# Altium PCB PCB.PcbDoc (part 3 of 6)
Units mm, origin at the board's own origin, x right, y up, seen from the top; angles counter-clockwise.
Board outline 56.61 x 57.68 mm, 2 copper layers (Top Layer, Bottom Layer), stack 0.572 mm thick; 104 components, 100 nets, 551 pads, 332 vias.
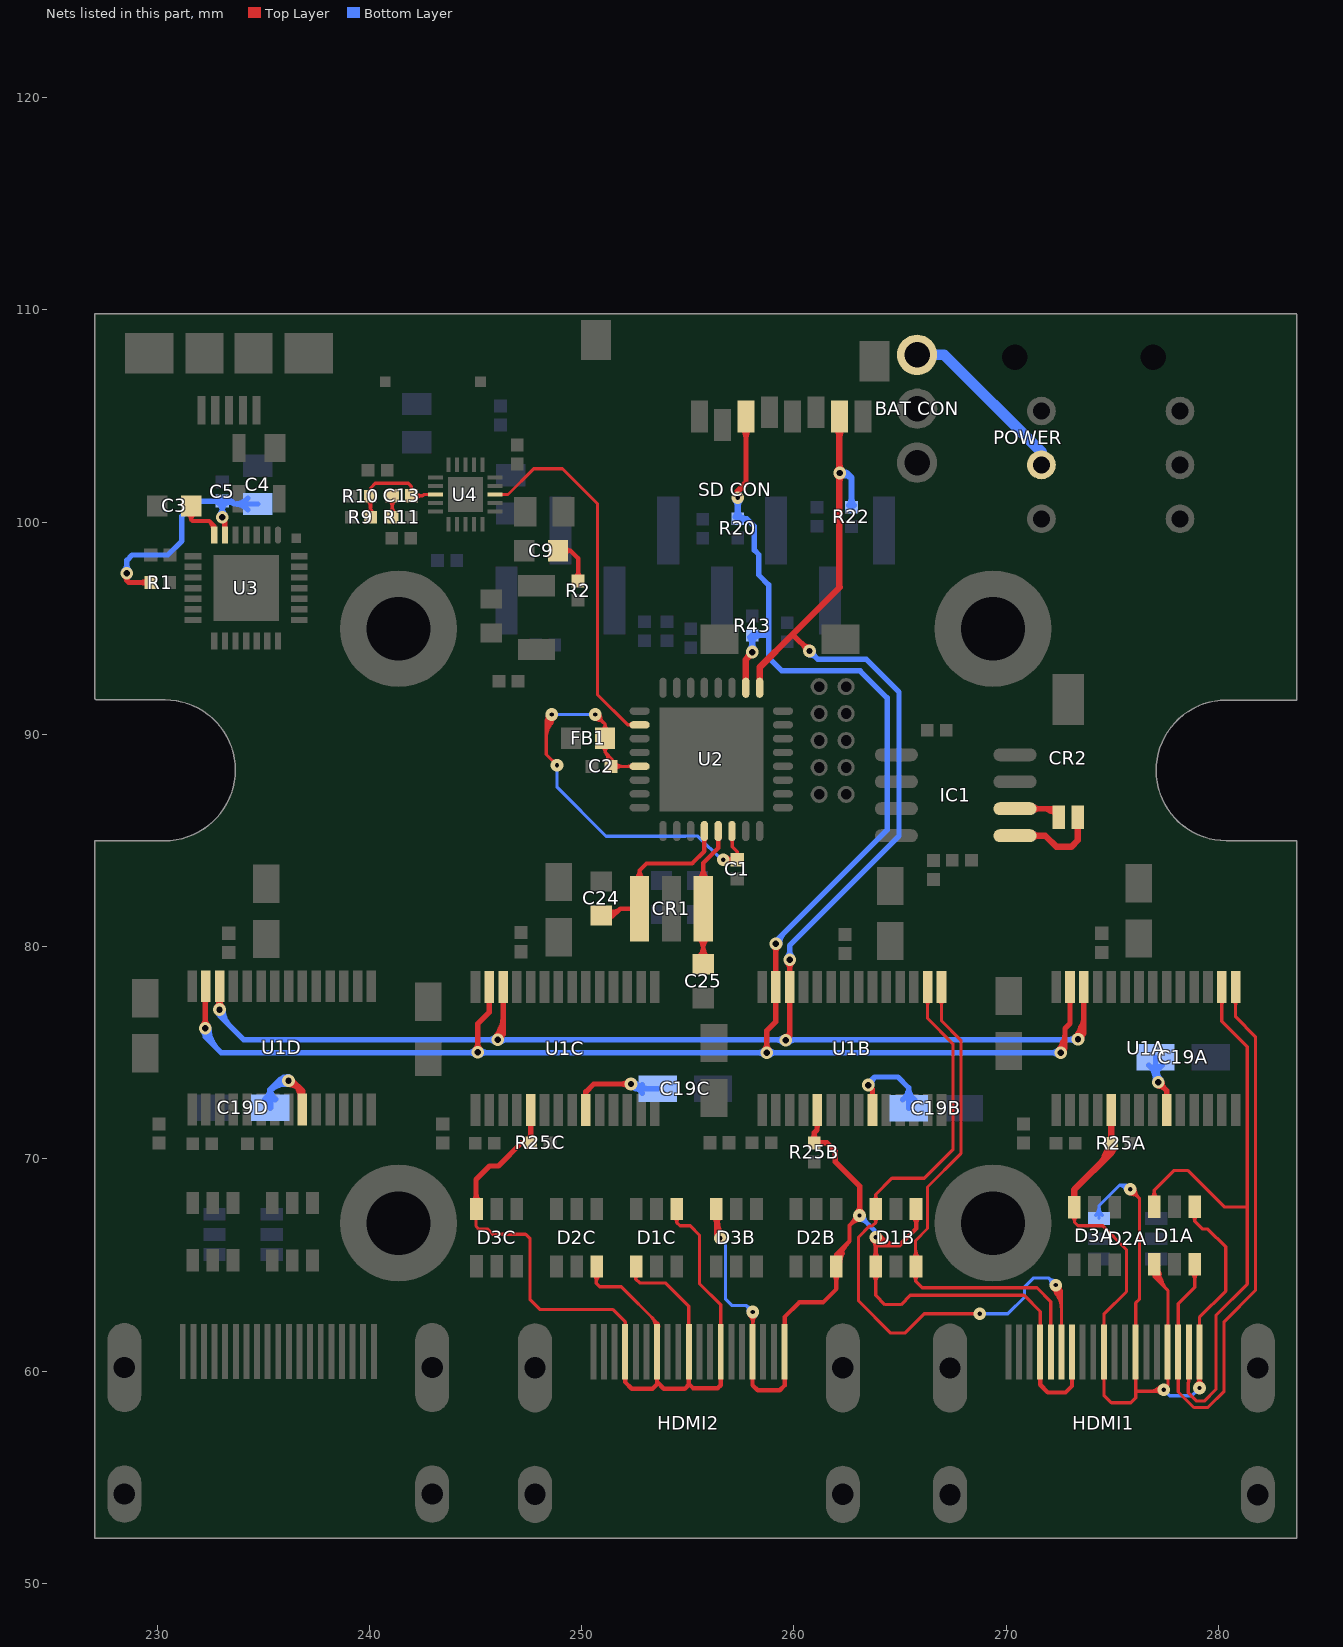
[diagram p3: the nets of this part, all layers, seen from the top]

## Via types
v1: diameter 0.6, hole 0.3, Top Layer to Bottom Layer, tented both sides, 242 vias
v2: diameter 0.6, hole 0.2, Top Layer to Bottom Layer, tented both sides, 80 vias
v3: diameter 0.8, hole 0.4, Top Layer to Bottom Layer, tented both sides, 9 vias
v4: diameter 0.66, hole 0.33, Top Layer to Bottom Layer, tented both sides, 1 vias

## Nets (pads, with @x,y where several pads share a name; then routed paths per layer and width w, separated by ;. In a path a pad name is that pad's centre, name@x,y a point inside that pad or via, vN(x,y) a via of type N, cw(c..) or ccw(c..) an arc to the next point about the centre after c; other vN are vias at no path point) (continued)
MISO: "SD CON.7" R22.2 U1A.26 U1B.26 U1C.26 U1D.26 U2.17 | length 127.9
  Top Layer w0.254: v1@232.84,77.177 ccw(c232.629,77.461) U1D.26@232.983,77.461 ; U1D.26@232.868,77.561 cw(c232.611,77.393) v1@232.908,77.313 ; 232.908,77.37 cw(c232.612,77.37) v1@232.821,77.161 ; U1D.26@232.908,77.472 ccw(c233.291,77.472) v1@233.051,77.173 ; v1(232.943,77.038) 232.95,77.045 U1D.26@232.95,78.139 ; v1@232.983,77.318 cw(c233.25,77.389) U1D.26@233.029,77.555 ; 232.983,77.361 ccw(c233.266,77.361) v1@233.066,77.161 ; v1(246.05,75.616) 246.3,75.866 ; v1@246.077,75.787 ccw(c246.111,76.003) 246.3,75.894 ; v1@246.202,75.698 cw(c246.676,75.956) 246.209,76.225 ; U1C.26@246.3,78.068 246.3,75.866 ; v1(259.613,75.59) 259.8,75.777 259.8,75.981 ; v1(259.8,79.391) U1B.26@259.8,78.1 259.8,75.981 ; 259.944,94.717 v1(260.731,93.929) ; v1(273.38,75.641) 273.656,75.917 ; v1@273.537,75.715 cw(c274.098,75.978) 273.561,76.289 ; 273.653,75.957 cw(c273.405,76.1) v1@273.389,75.814 ; U1A.26@273.656,78.109 273.656,75.917 ; v1@232.821,77.161 ccw(c232.509,77.473) 232.95,77.473 cw(c232.509,77.473) v1@232.821,77.161 ; 232.95,77.378 ccw(c232.714,77.378) 232.881,77.545 cw(c232.714,77.378) 232.95,77.378 ; 232.95,77.378 cw(c233.187,77.378) 233.02,77.545 ccw(c233.187,77.378) 232.95,77.378 ; v1@233.066,77.161 cw(c233.344,77.439) 232.95,77.439 ccw(c233.344,77.439) v1@233.066,77.161 ; 246.3,75.866 ccw(c246.496,75.671) 246.221,75.637 cw(c246.496,75.671) 246.3,75.866 ; 246.3,75.866 cw(c246.105,76.062) 246.071,75.787 ccw(c246.105,76.062) 246.3,75.866 ; 246.3,77.338 ccw(c246.064,77.338) 246.231,77.506 cw(c246.064,77.338) 246.3,77.338 ; 246.3,77.338 cw(c246.537,77.338) 246.37,77.506 ccw(c246.537,77.338) 246.3,77.338 ; 259.8,75.981 cw(c259.582,75.981) 259.599,75.763 ccw(c259.582,75.981) 259.8,75.981 ; 259.8,77.338 ccw(c259.564,77.338) 259.731,77.506 cw(c259.564,77.338) 259.8,77.338 ; 259.8,77.338 cw(c260.037,77.338) 259.87,77.506 ccw(c260.037,77.338) 259.8,77.338 ; 259.8,78.862 ccw(c260.037,78.862) 259.87,78.694 cw(c260.037,78.862) 259.8,78.862 ; 259.8,78.862 cw(c259.564,78.862) 259.731,78.694 ccw(c259.564,78.862) 259.8,78.862 ; 259.8,78.974 ccw(c259.383,78.974) 259.678,79.269 cw(c259.383,78.974) 259.8,78.974 ; 259.8,78.974 cw(c260.218,78.974) 259.923,79.269 ccw(c260.218,78.974) 259.8,78.974 ; 260.436,94.225 ccw(c260.731,94.52) 260.731,94.102 cw(c260.731,94.52) 260.436,94.225 ; 260.436,94.225 cw(c260.14,93.929) 260.558,93.929 ccw(c260.14,93.929) 260.436,94.225 ; v1@273.389,75.814 ccw(c273.407,76.165) 273.656,75.917 ; v1@273.389,75.814 ccw(c273.407,76.165) 273.656,75.917 ; 273.656,75.917 ccw(c273.904,75.668) 273.553,75.65 cw(c273.904,75.668) 273.656,75.917 ; 273.656,77.348 ccw(c273.419,77.348) 273.586,77.515 cw(c273.419,77.348) 273.656,77.348 ; 273.656,77.348 cw(c273.892,77.348) 273.725,77.515 ccw(c273.892,77.348) 273.656,77.348 ; v1@245.927,75.738 ccw(c245.027,76.638) 246.3,76.638 cw(c245.027,76.638) v1@245.927,75.738 ; v1@246.107,75.559 ccw(c245.64,76.025) 246.3,76.025 cw(c245.64,76.025) v1@246.107,75.559 ; v1@273.258,75.764 ccw(c272.298,76.724) 273.656,76.724 cw(c272.298,76.724) v1@273.258,75.764 ; v1@273.437,75.584 ccw(c272.911,76.111) 273.656,76.111 cw(c272.911,76.111) v1@273.437,75.584
  Top Layer w0.305: U2.17@258.383,92.199 258.383,93.156 259.944,94.717 262.153,96.926 ; 262.144,96.936 v1@262.144,102.54 ; v1@262.144,102.346 v1@262.144,102.54 ; 262.144,104.978 v1@262.144,102.54 ; 262.144,104.03 ccw(c261.546,104.03) 261.969,104.453 cw(c261.546,104.03) 262.144,104.03 ; 262.144,104.03 cw(c262.741,104.03) 262.319,104.453 ccw(c262.741,104.03) 262.144,104.03 ; v1@262.049,102.207 cw(c261.821,101.979) 262.144,101.979 ccw(c261.821,101.979) v1@262.049,102.207 ; v1@262.049,102.416 ccw(c261.821,102.644) 262.144,102.644 cw(c261.821,102.644) v1@262.049,102.416 ; 262.144,101.931 cw(c262.533,101.931) 262.258,102.207 ccw(c262.533,101.931) 262.144,101.931 ; 262.144,102.691 ccw(c262.533,102.691) 262.258,102.416 cw(c262.533,102.691) 262.144,102.691
  Bottom Layer w0.254: v1(232.943,77.038) 232.943,76.759 234.086,75.616 v1(246.05,75.616) 273.355,75.616 v1(273.38,75.641) ; v1(259.8,79.391) 259.8,80.052 264.947,85.217 264.947,91.999 263.398,93.548 261.112,93.548 v1(260.731,93.929) ; 245.632,75.616 ccw(c245.632,76.033) 245.927,75.738 cw(c245.632,76.033) 245.632,75.616 ; 245.632,75.616 cw(c245.632,75.198) 245.927,75.493 ccw(c245.632,75.198) 245.632,75.616 ; 246.467,75.616 ccw(c246.467,75.198) 246.172,75.493 cw(c246.467,75.198) 246.467,75.616 ; 246.467,75.616 cw(c246.467,76.033) 246.172,75.738 ccw(c246.467,76.033) 246.467,75.616 ; 259.8,79.809 ccw(c260.218,79.809) 259.923,79.514 cw(c260.218,79.809) 259.8,79.809 ; 259.8,79.809 cw(c259.383,79.809) 259.678,79.514 ccw(c259.383,79.809) 259.8,79.809 ; 261.026,93.634 ccw(c260.731,93.339) 260.731,93.756 cw(c260.731,93.339) 261.026,93.634 ; 261.026,93.634 cw(c261.322,93.929) 260.904,93.929 ccw(c261.322,93.929) 261.026,93.634 ; v1@232.862,77.038 ccw(c233.341,77.038) 233.003,76.7 cw(c233.341,77.038) v1@232.862,77.038 ; v1@233.116,77.038 ccw(c234.209,77.038) 233.436,76.266 cw(c234.209,77.038) v1@233.116,77.038 ; 259.134,75.616 cw(c259.134,75.111) 259.491,75.468 ccw(c259.134,75.111) 259.134,75.616 ; 259.257,75.616 ccw(c259.257,75.947) 259.491,75.713 cw(c259.257,75.947) 259.257,75.616 ; v1@259.736,75.468 cw(c260.092,75.111) 260.092,75.616 ccw(c260.092,75.111) v1@259.736,75.468 ; v1@259.736,75.713 ccw(c259.97,75.947) 259.97,75.616 cw(c259.97,75.947) v1@259.736,75.713 ; 272.901,75.616 ccw(c272.901,76.12) 273.258,75.764 cw(c272.901,76.12) 272.901,75.616 ; 273.024,75.616 cw(c273.024,75.285) 273.258,75.519 ccw(c273.024,75.285) 273.024,75.616
  Bottom Layer w0.305: v1(262.153,102.311) 262.484,102.311 ; R22.2@262.712,100.697 262.712,102.083 ; 262.484,102.311 ccw(c262.484,102.016) 262.263,102.213 cw(c262.484,102.016) 262.484,102.311 ; 262.484,102.311 cw(c262.484,102.607) 262.263,102.41 ccw(c262.484,102.607) 262.484,102.311 ; 262.484,102.311 262.712,102.083 ; 262.712,101.053 ccw(c263.069,101.053) 262.817,100.801 cw(c263.069,101.053) 262.712,101.053 ; 262.712,101.053 cw(c262.356,101.053) 262.608,100.801 ccw(c262.356,101.053) 262.712,101.053 ; 262.712,102.083 ccw(c262.394,101.765) 262.213,102.176 cw(c262.394,101.765) 262.712,102.083
MODE: U2.26 U4.3 | length 18.3
  Top Layer w0.152: U4.3@245.925,101.3 246.532,101.3 247.746,102.514 249.098,102.514 250.749,100.863 250.749,91.872 252.172,90.449 U2.26@252.733,90.449 ; 252.195,90.449 ccw(c252.195,90.687) 252.363,90.519 cw(c252.195,90.687) 252.195,90.449 ; 252.195,90.449 cw(c252.195,90.21) 252.363,90.379 ccw(c252.195,90.21) 252.195,90.449
MOSI: "SD CON.3" R20.2 R43.1 U1A.27 U1B.27 U1C.27 U1D.27 U2.18 | length 126.5
  Top Layer w0.254: v1(232.275,76.157) U1D.27@232.275,78.139 ; v1(245.11,75.032) 245.11,76.378 245.65,76.918 U1C.27@245.65,78.1 ; 257.744,101.838 257.744,104.978 ; v1(258.724,75.006) 258.724,76.048 259.15,76.474 U1B.27@259.15,78.1 v1(259.15,80.143) ; v1(272.567,75.006) 272.771,75.209 272.771,76.149 273.006,76.384 U1A.27@273.006,78.109 ; 272.684,75.543 ccw(c273.031,75.343) v1@272.707,75.108 ; 232.275,76.575 ccw(c232.693,76.575) 232.397,76.28 cw(c232.693,76.575) 232.275,76.575 ; 232.275,76.575 cw(c231.857,76.575) 232.153,76.28 ccw(c231.857,76.575) 232.275,76.575 ; 245.11,75.449 ccw(c245.528,75.449) 245.232,75.154 cw(c245.528,75.449) 245.11,75.449 ; 245.11,75.449 cw(c244.692,75.449) 244.988,75.154 ccw(c244.692,75.449) 245.11,75.449 ; 245.65,77.338 ccw(c245.414,77.338) 245.581,77.506 cw(c245.414,77.338) 245.65,77.338 ; 245.65,77.338 cw(c245.887,77.338) 245.72,77.506 ccw(c245.887,77.338) 245.65,77.338 ; 257.744,103.969 ccw(c257.085,103.969) 257.551,104.435 cw(c257.085,103.969) 257.744,103.969 ; 257.744,103.969 cw(c258.403,103.969) 257.937,104.435 ccw(c258.403,103.969) 257.744,103.969 ; 258.724,75.424 ccw(c259.142,75.424) 258.847,75.129 cw(c259.142,75.424) 258.724,75.424 ; 258.724,75.424 cw(c258.307,75.424) 258.602,75.129 ccw(c258.307,75.424) 258.724,75.424 ; 259.15,77.338 ccw(c258.914,77.338) 259.081,77.506 cw(c258.914,77.338) 259.15,77.338 ; 259.15,77.338 cw(c259.387,77.338) 259.22,77.506 ccw(c259.387,77.338) 259.15,77.338 ; 259.15,78.862 ccw(c259.387,78.862) 259.22,78.694 cw(c259.387,78.862) 259.15,78.862 ; 259.15,78.862 cw(c258.914,78.862) 259.081,78.694 ccw(c258.914,78.862) 259.15,78.862 ; 259.15,79.725 ccw(c258.733,79.725) 259.028,80.02 cw(c258.733,79.725) 259.15,79.725 ; 259.15,79.725 cw(c259.568,79.725) 259.273,80.02 ccw(c259.568,79.725) 259.15,79.725 ; 273.006,77.348 ccw(c272.769,77.348) 272.936,77.515 cw(c272.769,77.348) 273.006,77.348 ; 273.006,77.348 cw(c273.242,77.348) 273.075,77.515 ccw(c273.242,77.348) 273.006,77.348 ; 232.275,77.316 cw(c232.598,77.316) 232.37,77.545 ccw(c232.598,77.316) 232.275,77.316 ; v1@272.445,75.129 ccw(c271.659,75.914) 272.771,75.914 cw(c271.659,75.914) v1@272.445,75.129 ; v1@272.625,74.949 ccw(c272.272,75.301) 272.771,75.301 cw(c272.272,75.301) v1@272.625,74.949
  Top Layer w0.305: v2(257.353,101.143) 257.353,101.448 ; 257.7,101.795 257.353,101.448 ; U2.18@257.733,92.199 257.733,93.522 258.039,93.828 v1(258.039,93.878) ; 257.353,101.448 ccw(c257.594,101.448) 257.444,101.259 cw(c257.594,101.448) 257.353,101.448 ; 257.353,101.448 cw(c257.112,101.448) 257.261,101.259 ccw(c257.112,101.448) 257.353,101.448 ; 257.751,93.54 ccw(c257.412,93.878) 257.891,93.878 cw(c257.412,93.878) 257.751,93.54
  Bottom Layer w0.254: v1@232.189,76.007 cw(c231.694,75.152) 232.649,75.407 ; v1(232.275,76.157) 232.275,75.751 ; v1@245.11,75.006 257.556,75.006 ; v1(245.11,75.032) 245.085,75.006 233.02,75.006 232.275,75.751 ; R20.2@257.353,100.152 257.785,100.152 258.14,99.797 258.14,98.679 258.343,98.476 258.343,97.511 258.813,97.041 258.813,94.673 ; 257.683,75.006 257.556,75.006 ; R43.1@258.039,94.673 258.813,94.673 ; v1(259.15,80.143) 259.15,80.258 264.389,85.496 264.389,91.719 263.119,92.989 259.436,92.989 258.813,93.612 258.813,94.673 ; v1(272.567,75.006) v1(258.724,75.006) 257.556,75.006 ; 232.275,75.751 ccw(c231.884,75.751) 232.155,76.033 cw(c231.884,75.751) 232.275,75.751 ; 232.275,75.751 cw(c232.666,75.751) 232.395,76.033 ccw(c232.666,75.751) 232.275,75.751 ; 257.77,100.152 ccw(c257.77,99.735) 257.475,100.03 cw(c257.77,99.735) 257.77,100.152 ; 257.77,100.152 cw(c257.77,100.57) 257.475,100.275 ccw(c257.77,100.57) 257.77,100.152 ; 258.307,75.006 ccw(c258.307,75.424) 258.602,75.129 cw(c258.307,75.424) 258.307,75.006 ; 258.307,75.006 cw(c258.307,74.589) 258.602,74.884 ccw(c258.307,74.589) 258.307,75.006 ; 258.456,94.673 ccw(c258.456,94.255) 258.161,94.551 cw(c258.456,94.255) 258.456,94.673 ; 258.456,94.673 cw(c258.456,95.091) 258.161,94.795 ccw(c258.456,95.091) 258.456,94.673 ; 259.142,75.006 ccw(c259.142,74.589) 258.847,74.884 cw(c259.142,74.589) 259.142,75.006 ; 259.142,75.006 cw(c259.142,75.424) 258.847,75.129 ccw(c259.142,75.424) 259.142,75.006 ; 272.15,75.006 ccw(c272.15,75.424) 272.445,75.129 cw(c272.15,75.424) 272.15,75.006 ; 272.15,75.006 cw(c272.15,74.589) 272.445,74.884 ccw(c272.15,74.589) 272.15,75.006 ; v1@232.194,76.157 ccw(c232.98,76.157) 232.424,75.602 cw(c232.98,76.157) v1@232.194,76.157 ; v1@232.448,76.157 ccw(c233.847,76.157) 232.858,75.168 cw(c233.847,76.157) v1@232.448,76.157 ; 244.631,75.006 ccw(c244.631,75.511) 244.988,75.154 cw(c244.631,75.511) 244.631,75.006 ; 244.754,75.006 cw(c244.754,74.675) 244.988,74.909 ccw(c244.754,74.675) 244.754,75.006 ; v1@245.232,74.909 cw(c245.466,74.675) 245.466,75.006 ccw(c245.466,74.675) v1@245.232,74.909 ; v1@245.232,75.154 ccw(c245.589,75.511) 245.589,75.006 cw(c245.589,75.511) v1@245.232,75.154 ; v1@259.323,80.143 cw(c260.02,80.143) 259.527,80.635 ccw(c260.02,80.143) v1@259.323,80.143
  Bottom Layer w0.305: R20.2@257.353,100.152 v2(257.353,101.143) ; v1(258.039,93.878) R43.1@258.039,94.673 ; 257.353,100.509 ccw(c257.709,100.509) 257.457,100.257 cw(c257.709,100.509) 257.353,100.509 ; 257.353,100.509 cw(c256.996,100.509) 257.248,100.257 ccw(c256.996,100.509) 257.353,100.509 ; 257.353,100.786 ccw(c256.996,100.786) 257.248,101.038 cw(c256.996,100.786) 257.353,100.786 ; 257.353,100.786 cw(c257.709,100.786) 257.457,101.038 ccw(c257.709,100.786) 257.353,100.786 ; 258.039,94.235 ccw(c258.395,94.235) 258.143,93.983 cw(c258.395,94.235) 258.039,94.235 ; 258.039,94.235 cw(c257.682,94.235) 257.934,93.983 ccw(c257.682,94.235) 258.039,94.235 ; 258.039,94.317 ccw(c257.682,94.317) 257.934,94.569 cw(c257.682,94.317) 258.039,94.317 ; 258.039,94.317 cw(c258.395,94.317) 258.143,94.569 ccw(c258.395,94.317) 258.039,94.317
"NetBAT CON_1": "BAT CON.1" POWER.3 | length 8.4
  Bottom Layer w0.508: 265.8,107.88 267.075,107.88 271.658,103.296 POWER.3@271.658,102.692
NetC1_2: C1.2 C2.2 FB1.2 U2.6 U2.29 | length 48.3
  Top Layer w0.152: 248.336,90.649 cw(c248.471,90.571) v2@248.52,90.719 ; 248.346,90.667 ccw(c248.11,90.803) v2@248.374,90.874 ; 248.391,90.45 ccw(c248.063,90.639) v2@248.394,90.823 ; v2@248.424,90.782 cw(c248.135,90.522) 248.466,90.317 ; 248.463,90.574 cw(c248.727,90.421) v2@248.648,90.716 ; v2@248.537,90.884 cw(c248.292,90.663) 248.572,90.49 ; v2(248.59,90.932) 248.336,90.678 ; v2(248.844,88.544) 248.336,89.052 248.336,90.678 ; v2@250.568,90.916 ccw(c250.887,90.981) 250.803,90.667 ; v2(250.647,90.932) 251.104,90.475 ; v2@250.663,91.011 cw(c250.598,90.692) 250.913,90.777 ; U2.29@252.728,88.494 C2.2@251.384,88.494 251.384,88.875 ; v2(256.674,84.092) C1.2@257.327,84.092 257.327,84.48 ; C1.2@257.099,84.041 ccw(c256.955,84.009) 256.993,84.151 ccw(c257.023,84.263) C1.2@257.123,84.206 ; C1.2@257.099,84.143 cw(c256.955,84.176) 256.993,84.033 cw(c257.023,83.922) C1.2@257.123,83.978 ; U2.6@257.099,85.433 257.099,84.709 257.327,84.48 ; 248.336,90.678 ccw(c248.211,90.803) 248.378,90.86 cw(c248.211,90.803) 248.336,90.678 ; 248.336,90.678 cw(c248.461,90.553) 248.517,90.72 ccw(c248.461,90.553) 248.336,90.678 ; 251.029,90.55 ccw(c250.647,90.168) 250.647,90.708 cw(c250.647,90.168) 251.029,90.55 ; 251.029,90.55 cw(c251.411,90.932) 250.871,90.932 ccw(c251.411,90.932) 251.029,90.55 ; 251.104,89.154 ccw(c250.798,89.154) 250.931,89.43 cw(c250.798,89.154) 251.104,89.154 ; 251.104,89.154 cw(c251.411,89.154) 251.278,89.43 ccw(c251.411,89.154) 251.104,89.154 ; 251.104,89.154 cw(c250.782,88.831) 251.18,88.608 ccw(c250.782,88.831) 251.104,89.154 ; 251.104,89.154 FB1.2@251.104,89.814 251.104,90.475 ; 251.104,89.154 251.384,88.875 ; 251.104,90.475 ccw(c251.411,90.475) 251.278,90.199 cw(c251.411,90.475) 251.104,90.475 ; 251.104,90.475 cw(c250.798,90.475) 250.931,90.199 ccw(c250.798,90.475) 251.104,90.475 ; 251.384,88.875 ccw(c251.577,88.875) 251.49,88.702 cw(c251.577,88.875) 251.384,88.875 ; 251.384,88.875 cw(c251.19,88.875) 251.278,88.702 ccw(c251.19,88.875) 251.384,88.875 ; 251.948,88.494 ccw(c251.948,87.929) 251.549,88.328 cw(c251.948,87.929) 251.948,88.494 ; 251.948,88.494 cw(c251.948,89.058) 251.549,88.659 ccw(c251.948,89.058) 251.948,88.494 ; v2@256.763,84.092 ccw(c256.763,84.657) 257.162,84.258 cw(c256.763,84.657) v2@256.763,84.092 ; v2@256.763,84.092 cw(c256.763,83.528) 257.162,83.927 ccw(c256.763,83.528) v2@256.763,84.092 ; v2@256.862,83.971 cw(c256.973,83.9) 257.007,84.027 ; v2@256.862,83.971 cw(c256.973,83.9) 257.007,84.027 ; v2@256.862,83.971 cw(c256.973,83.9) 257.007,84.027 ; v2@256.862,84.213 ccw(c256.973,84.284) 257.007,84.158 ; v2@256.862,84.213 ccw(c256.973,84.284) 257.007,84.158 ; v2@256.862,84.213 ccw(c256.973,84.284) 257.007,84.158 ; v2@256.892,84.04 cw(c257.048,84.002) 257.007,84.158 ; v2@256.892,84.04 cw(c257.048,84.002) 257.007,84.158 ; v2@256.892,84.04 cw(c257.048,84.002) 257.007,84.158 ; v2@256.892,84.145 ccw(c257.048,84.183) 257.007,84.027 ; v2@256.892,84.145 ccw(c257.048,84.183) 257.007,84.027 ; v2@256.892,84.145 ccw(c257.048,84.183) 257.007,84.027 ; C1.2@257.214,84.092 ccw(c257.214,83.552) 256.832,83.934 cw(c257.214,83.552) C1.2@257.214,84.092 ; C1.2@257.214,84.092 cw(c257.214,84.632) 256.832,84.25 ccw(c257.214,84.632) C1.2@257.214,84.092 ; 257.327,84.48 ccw(c257.533,84.48) 257.437,84.299 cw(c257.533,84.48) 257.327,84.48 ; 257.327,84.48 cw(c257.122,84.48) 257.218,84.299 ccw(c257.122,84.48) 257.327,84.48 ; 248.336,89.778 cw(c249.743,89.778) 248.748,90.774 ccw(c249.743,89.778) 248.336,89.778 ; 248.336,90.146 cw(c249.375,90.146) 248.64,90.882 ccw(c249.375,90.146) 248.336,90.146 ; 248.336,90.514 cw(c249.007,90.514) 248.533,90.989 ccw(c249.007,90.514) 248.336,90.514 ; 251.247,89.012 cw(c250.964,88.729) 251.313,88.533 ccw(c250.964,88.729) 251.247,89.012 ; 251.389,88.869 cw(c251.146,88.627) 251.446,88.459 ccw(c251.146,88.627) 251.389,88.869 ; 252.182,88.494 ccw(c252.182,88.75) 252.363,88.569 cw(c252.182,88.75) 252.182,88.494 ; 252.207,88.494 cw(c252.207,88.273) 252.363,88.429 ccw(c252.207,88.273) 252.207,88.494 ; U2.6@257.013,85.079 cw(c256.807,84.873) 257.099,84.873 ccw(c256.807,84.873) U2.6@257.013,85.079 ; 257.099,84.948 cw(c257.284,84.948) 257.153,85.079 ccw(c257.284,84.948) 257.099,84.948
  Bottom Layer w0.152: v2(248.59,90.932) v2(250.647,90.932) ; v2(248.844,88.544) 248.844,87.503 251.147,85.2 254.886,85.2 254.899,85.212 255.478,85.212 256.598,84.092 v2(256.674,84.092)
NetC3_1: C3.1 U3.7 | length 4.8
  Top Layer w0.203: C3.1@231.61,100.762 231.61,100.114 ; 232.594,99.849 ccw(c232.861,99.921) U3.7@232.723,99.681 ; U3.7@232.699,99.389 232.699,99.813 232.461,100.051 231.673,100.051 231.61,100.114 ; 231.61,100.114 ccw(c231.277,100.114) 231.434,100.407 cw(c231.277,100.114) 231.61,100.114 ; 231.61,100.114 cw(c231.942,100.114) 231.786,100.407 ccw(c231.942,100.114) 231.61,100.114 ; 232.493,100.018 cw(c232.114,99.639) 232.65,99.639 ccw(c232.114,99.639) 232.493,100.018
NetC4_2: C4.2 C5.1 R1.2 U3.6 | length 25.6
  Top Layer w0.254: v1(228.575,97.587) 228.575,97.257 ; R1.2@229.699,97.155 228.676,97.155 228.575,97.257 ; v1(233.07,100.228) 233.07,100.127 233.199,99.999 U3.6@233.199,99.389 ; 228.575,97.257 ccw(c228.346,97.257) 228.476,97.445 cw(c228.346,97.257) 228.575,97.257 ; 228.575,97.257 cw(c228.803,97.257) 228.673,97.445 ccw(c228.803,97.257) 228.575,97.257 ; 229.282,97.155 ccw(c229.282,97.573) 229.577,97.277 cw(c229.282,97.573) 229.282,97.155 ; 229.282,97.155 cw(c229.282,96.737) 229.577,97.033 ccw(c229.282,96.737) 229.282,97.155
  Bottom Layer w0.254: v1(228.575,97.587) 228.575,98.196 228.829,98.45 230.505,98.45 231.165,99.111 231.165,100.279 231.877,100.99 C5.1@233.07,100.99 ; v1(233.07,100.228) C5.1@233.07,100.99 ; C4.2@234.747,100.852 233.64,100.852 ; 228.575,98.004 ccw(c228.992,98.004) 228.697,97.709 cw(c228.992,98.004) 228.575,98.004 ; 228.575,98.004 cw(c228.157,98.004) 228.452,97.709 ccw(c228.157,98.004) 228.575,98.004 ; 232.629,100.99 ccw(c232.629,101.432) 232.941,101.12 cw(c232.629,101.432) 232.629,100.99 ; 232.629,100.99 cw(c232.629,100.549) C5.1@232.941,100.861 ; 232.629,100.99 cw(c232.629,100.549) C5.1@232.941,100.861 ; C5.1@232.941,100.861 cw(c232.629,100.549) 233.07,100.549 ; C5.1@232.941,100.861 cw(c232.629,100.549) 233.07,100.549 ; 233.07,100.549 cw(c233.512,100.549) 233.2,100.861 ccw(c233.512,100.549) 233.07,100.549 ; 233.07,100.646 ccw(c233.488,100.646) 233.193,100.351 cw(c233.488,100.646) 233.07,100.646 ; 233.07,100.646 cw(c232.653,100.646) 232.948,100.351 ccw(c232.653,100.646) 233.07,100.646 ; C5.1@233.07,100.99 233.502,100.99 ; 233.502,100.99 ccw(c233.502,100.573) 233.202,100.863 cw(c233.502,100.573) 233.502,100.99 ; 233.502,100.99 cw(c233.502,101.408) 233.202,101.118 ccw(c233.502,101.408) 233.502,100.99 ; 233.502,100.99 233.64,100.852 ; 233.64,100.852 ccw(c233.416,100.628) 233.197,100.858 cw(c233.416,100.628) 233.64,100.852 ; 233.64,100.852 ccw(c233.64,101.744) 234.284,101.128 cw(c233.64,101.744) 233.64,100.852 ; 233.64,100.852 cw(c233.64,99.961) 234.284,100.577 ccw(c233.64,99.961) 233.64,100.852 ; C5.1@233.021,101.042 cw(c233.236,100.816) 233.456,101.036 ccw(c233.236,100.816) C5.1@233.021,101.042
NetC9_2: C9.2 R2.2 | length 4.9
  Top Layer w0.203: C9.2@248.894,98.654 249.479,98.654 ; R2.2@249.834,97.224 249.834,98.298 249.479,98.654 ; 249.479,98.654 ccw(c249.479,98.383) 249.233,98.497 cw(c249.479,98.383) 249.479,98.654 ; 249.479,98.654 cw(c249.479,98.924) 249.233,98.81 ccw(c249.479,98.924) 249.479,98.654 ; 249.834,97.703 ccw(c250.313,97.703) 249.975,97.364 cw(c250.313,97.703) 249.834,97.703 ; 249.834,97.703 cw(c249.355,97.703) 249.694,97.364 ccw(c249.355,97.703) 249.834,97.703
NetC13_1: C13.1 R9.2 R10.1 U4.13 | length 12.1
  Top Layer w0.152: R9.2@240.055,100.228 240.055,101.6 ; U4.13@243.125,101.3 242.565,101.3 242.51,101.244 ; 240.055,100.769 ccw(c240.596,100.769) 240.214,100.387 cw(c240.596,100.769) 240.055,100.769 ; 240.055,100.769 cw(c239.515,100.769) 239.897,100.387 ccw(c239.515,100.769) 240.055,100.769 ; 240.055,101.6 ccw(c240.275,101.6) 240.163,101.411 cw(c240.275,101.6) 240.055,101.6 ; 240.055,101.6 cw(c239.85,101.6) 239.945,101.417 ccw(c239.85,101.6) 240.055,101.6 ; 240.055,101.6 240.284,101.829 241.833,101.829 241.979,101.683 ; 241.979,101.683 ccw(c242.274,101.683) 242.109,101.438 cw(c242.274,101.683) 241.979,101.683 ; 241.979,101.683 cw(c241.683,101.683) 241.848,101.438 ccw(c241.683,101.683) 241.979,101.683 ; 241.979,101.683 C13.1@241.979,101.244 242.51,101.244 ; 242.51,101.244 ccw(c242.51,100.758) 242.151,101.087 cw(c242.51,100.758) 242.51,101.244 ; 242.51,101.244 cw(c242.51,101.73) 242.151,101.402 ccw(c242.51,101.73) 242.51,101.244 ; R10.1@239.89,101.061 cw(c239.491,100.661) 240.055,100.661 ccw(c239.491,100.661) R10.1@239.89,101.061 ; 240.055,100.696 cw(c240.571,100.696) 240.206,101.061 ccw(c240.571,100.696) 240.055,100.696
NetC13_2: C13.2 R11.1 | length 4.5
  Top Layer w0.152: R11.1@241.079,100.228 C13.2@241.079,101.244 ; 241.079,100.68 ccw(c240.514,100.68) 240.913,101.079 cw(c240.514,100.68) 241.079,100.68 ; 241.079,100.68 cw(c241.643,100.68) 241.244,101.079 ccw(c241.643,100.68) 241.079,100.68 ; 241.079,100.769 ccw(c241.619,100.769) 241.237,100.387 cw(c241.619,100.769) 241.079,100.769 ; 241.079,100.769 cw(c240.538,100.769) 240.92,100.387 ccw(c240.538,100.769) 241.079,100.769
NetC19A_1: C19A.1 U1A.9 | length 12.2
  Top Layer w0.254: v1(277.165,73.609) 277.556,73.218 U1A.9@277.556,72.309 ; 277.46,73.314 ccw(c277.165,73.019) 277.165,73.436 cw(c277.165,73.019) 277.46,73.314 ; 277.46,73.314 cw(c277.755,73.609) 277.338,73.609 ccw(c277.755,73.609) 277.46,73.314 ; 277.556,73.071 ccw(c277.792,73.071) 277.625,72.904 cw(c277.792,73.071) 277.556,73.071 ; 277.556,73.071 cw(c277.319,73.071) 277.486,72.904 ccw(c277.319,73.071) 277.556,73.071
  Bottom Layer w0.254: C19A.1@276.887,74.327 cw(c276.795,74.029) 277.096,74.11 cw(c277.282,74.159) C19A.1@277.212,74.338 ; 276.982,74.028 cw(c276.796,73.842) v1@277.019,73.702 ; C19A.1@277.033,74.803 v1@277.033,73.741 ; v1@277.056,73.744 ccw(c276.913,73.922) 277.111,74.037 ; v1(277.165,73.609) v1@277.033,73.741 ; C19A.1@276.909,74.206 ccw(c277.619,74.396) v1@277.251,73.759 ; C19A.1@276.909,74.206 ccw(c277.619,74.396) v1@277.251,73.759 ; C19A.1@276.909,74.206 ccw(c277.619,74.396) v1@277.251,73.759 ; v1@277.033,73.741 ccw(c276.15,73.741) 276.715,74.42 cw(c276.15,73.741) v1@277.033,73.741 ; v1@277.033,73.741 cw(c277.917,73.741) 277.352,74.42 ccw(c277.917,73.741) v1@277.033,73.741 ; C19A.1@277.033,74.345 ccw(c277.9,74.345) 277.287,73.732 cw(c277.9,74.345) C19A.1@277.033,74.345
NetC19B_1: C19B.1 U1B.9 | length 8.7
  Top Layer w0.203: U1B.9@263.677,72.323 U1B.9@263.7,72.3
  Top Layer w0.254: v1(263.5,73.482) 263.7,73.281 U1B.9@263.7,72.3 ; 263.7,73.062 ccw(c263.937,73.062) 263.77,72.894 cw(c263.937,73.062) 263.7,73.062 ; 263.7,73.062 cw(c263.464,73.062) 263.631,72.894 ccw(c263.464,73.062) 263.7,73.062
  Bottom Layer w0.254: v1(263.5,73.482) 263.5,73.558 263.804,73.863 ; C19B.1@265.405,72.39 265.405,73.355 ; 263.804,73.863 ccw(c264.129,73.539) 263.672,73.498 cw(c264.129,73.539) 263.804,73.863 ; 263.804,73.863 264.897,73.863 265.405,73.355 ; 265.405,73.355 ccw(c266.091,73.355) 265.693,72.796 cw(c266.091,73.355) 265.405,73.355 ; 265.405,73.355 cw(c264.718,73.355) 265.116,72.796 ccw(c264.718,73.355) 265.405,73.355
NetC19C_1: C19C.1 U1C.9 | length 11.4
  Top Layer w0.254: U1C.9@250.2,72.3 250.2,73.162 250.571,73.533 v1(252.324,73.533) ; 250.2,73.062 ccw(c250.437,73.062) 250.27,72.894 cw(c250.437,73.062) 250.2,73.062 ; 250.2,73.062 cw(c249.964,73.062) 250.131,72.894 ccw(c249.964,73.062) 250.2,73.062 ; 251.906,73.533 ccw(c251.906,73.951) 252.201,73.655 cw(c251.906,73.951) 251.906,73.533 ; 251.906,73.533 cw(c251.906,73.115) 252.201,73.411 ccw(c251.906,73.115) 251.906,73.533
  Bottom Layer w0.254: v1(252.324,73.533) 252.552,73.304 ; v1@252.415,73.386 cw(c252.663,72.985) C19C.1@252.899,73.393 ; C19C.1@253.589,73.304 252.552,73.304 ; 252.552,73.304 ccw(c252.552,73.638) 252.858,73.504 cw(c252.552,73.638) 252.552,73.304 ; 252.552,73.304 cw(c252.552,72.971) 252.858,73.105 ccw(c252.552,72.971) 252.552,73.304 ; v1@252.266,73.476 ccw(c252.68,73.889) 252.68,73.304 cw(c252.68,73.889) v1@252.266,73.476 ; v1@252.446,73.655 ccw(c253.293,74.503) 253.293,73.304 cw(c253.293,74.503) v1@252.446,73.655
NetC19D_1: C19D.1 U1D.9 | length 11.8
  Top Layer w0.305: v1(236.195,73.685) 236.22,73.711 236.322,73.711 236.85,73.182 U1D.9@236.85,72.339 ; v1@236.195,73.538 cw(c236.195,72.814) 236.707,73.326 ccw(c236.195,72.814) v1@236.195,73.538 ; 236.502,73.531 cw(c235.835,72.864) 236.778,72.864 ccw(c235.835,72.864) 236.502,73.531
  Bottom Layer w0.305: C19D.1@235.331,72.415 235.331,73.254 ; v1(236.195,73.685) 236.169,73.711 235.788,73.711 ; 235.331,73.254 ccw(c235.838,73.254) 235.576,72.82 cw(c235.838,73.254) 235.331,73.254 ; 235.331,73.254 cw(c234.824,73.254) 235.086,72.82 ccw(c234.824,73.254) 235.331,73.254 ; 235.331,73.254 cw(c236.042,72.543) 236.175,73.539 ccw(c236.042,72.543) 235.331,73.254 ; 235.331,73.254 235.788,73.711 ; 235.788,73.711 cw(c235.788,73.295) 236.088,73.583 ccw(c235.788,73.295) 235.788,73.711 ; 235.767,73.689 cw(c236.145,73.312) 236.215,73.841 ccw(c236.145,73.312) 235.767,73.689
NetC24_2: C24.2 CR1.1 U2.4 | length 15.6
  Top Layer w0.203: C24.2@250.927,81.471 251.498,81.471 ; CR1.1@252.729,81.788 251.816,81.788 ; CR1.1@252.73,81.789 252.73,83.591 ; U2.4@255.783,85.449 255.783,84.5 255.205,83.922 253.06,83.922 252.73,83.591 ; 251.498,81.471 ccw(c251.498,81.257) 251.299,81.335 cw(c251.498,81.257) 251.498,81.471 ; 251.498,81.471 cw(c251.498,81.684) 251.299,81.606 ccw(c251.498,81.684) 251.498,81.471 ; 251.498,81.471 251.816,81.788 ; 251.816,81.788 cw(c251.486,82.117) 251.19,81.758 ccw(c251.486,82.117) 251.816,81.788 ; 252.73,83.591 ccw(c253.268,83.591) 252.941,83.164 cw(c253.268,83.591) 252.73,83.591 ; 252.73,83.591 cw(c252.196,83.591) 252.518,83.166 ccw(c252.196,83.591) 252.73,83.591 ; 255.783,84.972 ccw(c255.606,84.972) 255.731,85.097 cw(c255.606,84.972) 255.783,84.972 ; 255.783,84.972 cw(c255.96,84.972) 255.835,85.097 ccw(c255.96,84.972) 255.783,84.972 ; C24.2@250.931,81.445 ccw(c251.2,81.771) 251.5,81.472 cw(c251.2,81.771) C24.2@250.931,81.445 ; C24.2@251.06,81.602 ccw(c251.343,81.944) 251.658,81.63 cw(c251.343,81.944) C24.2@251.06,81.602
NetC25_2: C25.2 CR1.3 U2.5 | length 15.2
  Top Layer w0.203: C25.2@255.727,79.172 255.727,81.787 CR1.3@255.729,81.788 255.729,83.943 256.433,84.647 U2.5@256.433,85.449 ; 255.727,80.073 ccw(c256.629,80.073) 255.991,79.436 cw(c256.629,80.073) 255.727,80.073 ; 255.727,80.073 cw(c254.826,80.073) 255.463,79.436 ccw(c254.826,80.073) 255.727,80.073 ; 255.729,83.729 ccw(c256.57,83.729) 255.975,83.134 cw(c256.57,83.729) 255.729,83.729 ; 255.729,83.729 cw(c254.887,83.729) 255.482,83.134 ccw(c254.887,83.729) 255.729,83.729 ; 256.433,84.972 ccw(c256.256,84.972) 256.381,85.097 cw(c256.256,84.972) 256.433,84.972 ; 256.433,84.972 cw(c256.61,84.972) 256.485,85.097 ccw(c256.61,84.972) 256.433,84.972 ; CR1.3@255.482,80.442 cw(c254.891,79.85) 255.727,79.85 ccw(c254.891,79.85) CR1.3@255.482,80.442 ; 255.727,79.844 cw(c256.573,79.844) 255.975,80.442 ccw(c256.573,79.844) 255.727,79.844
NetCR2_1: CR2.1 IC1.2 | length 5.1
  Top Layer w0.254: IC1.2@270.413,86.5 CR2.1@272.313,86.5 ; 272.02,86.42 ccw(c272.154,86.652) CR2.1@272.349,86.469 ; 271.554,86.5 ccw(c271.554,86.071) 271.25,86.374 cw(c271.554,86.071) 271.554,86.5 ; 271.554,86.5 cw(c271.554,86.929) 271.25,86.626 ccw(c271.554,86.929) 271.554,86.5 ; 271.696,86.5 cw(c271.696,85.57) 272.353,86.228 ccw(c271.696,85.57) 271.696,86.5
NetCR2_2: CR2.2 IC1.1 | length 6.7
  Top Layer w0.305: IC1.1@270.413,85.23 271.843,85.23 272.364,84.709 273.075,84.709 273.375,85.009 CR2.2@273.375,86.1 ; 271.493,85.23 ccw(c271.493,84.862) 271.232,85.122 cw(c271.493,84.862) 271.493,85.23 ; 271.493,85.23 cw(c271.493,85.598) 271.232,85.338 ccw(c271.493,85.598) 271.493,85.23 ; 273.375,85.494 ccw(c273.019,85.494) 273.271,85.746 cw(c273.019,85.494) 273.375,85.494 ; 273.375,85.494 cw(c273.732,85.494) 273.48,85.746 ccw(c273.732,85.494) 273.375,85.494
NetD1A_1: D1A.1 D1A.4 D2A.6 D3A.3 HDMI1.1 HDMI1.4 HDMI1.7 HDMI1.10 R25A.2 U1A.5 | length 81.3
  Top Layer w0.152: D3A.3@273.215,67.716 273.215,67.018 ; v2@275.765,68.564 ccw(c276.084,68.629) 275.999,68.315 ; v2(275.844,68.58) 276.276,68.148 ; v2@275.86,68.659 cw(c275.795,68.34) 276.109,68.425 ; 276.154,63.276 276.212,63.335 ; 276.276,68.123 276.276,63.398 276.212,63.335 ; D1A.4@276.941,64.759 cw(c276.483,63.972) 277.363,64.205 ; D1A.4@276.942,64.758 cw(c276.754,64.421) 277.128,64.519 ; D1A.4@276.977,65.046 276.977,64.45 ; D1A.4@277.018,64.891 cw(c276.745,64.422) D1A.4@277.269,64.56 ; 277.139,64.477 cw(c277.434,64.555) D1A.4@277.17,64.708 ; D1A.1@278.877,67.746 278.877,67.071 ; HDMI1.1@279.045,59.717 cw(c278.914,59.642) 279.06,59.603 ; 279.059,59.599 cw(c279.21,59.558) HDMI1.1@279.132,59.694 ; HDMI1.1@279.068,59.694 cw(c278.99,59.558) 279.141,59.599 ; v2(279.1,59.212) HDMI1.1@279.1,60.909 279.1,62.54 280.34,63.779 280.34,65.862 279.502,66.7 279.248,66.7 278.877,67.071 ; 279.14,59.603 cw(c279.286,59.642) HDMI1.1@279.155,59.717 ; 273.215,67.018 ccw(c272.823,67.018) 273.068,67.324 cw(c272.823,67.018) 273.215,67.018 ; 273.215,67.018 cw(c273.635,67.018) 273.356,67.332 ccw(c273.635,67.018) 273.215,67.018 ; 273.215,67.018 273.38,66.853 274.549,66.853 275.666,65.735 275.666,63.755 274.6,62.689 HDMI1.10@274.6,60.909 274.6,58.877 274.955,58.522 275.869,58.522 276.098,58.75 276.098,59.131 ; 274.6,59.595 ccw(c274.446,59.595) 274.555,59.704 cw(c274.446,59.595) 274.6,59.595 ; 274.6,59.595 cw(c274.754,59.595) 274.645,59.704 ccw(c274.754,59.595) 274.6,59.595 ; 274.6,62.223 ccw(c274.754,62.223) 274.645,62.114 cw(c274.754,62.223) 274.6,62.223 ; 274.6,62.223 cw(c274.446,62.223) 274.555,62.114 ccw(c274.446,62.223) 274.6,62.223 ; 276.098,59.131 276.174,59.055 277.368,59.055 277.617,59.304 277.617,63.809 ; 276.098,59.131 276.098,60.907 HDMI1.7@276.1,60.909 276.1,63.223 276.212,63.335 ; 276.1,62.223 ccw(c276.254,62.223) 276.145,62.114 cw(c276.254,62.223) 276.1,62.223 ; 276.1,62.223 cw(c275.946,62.223) 276.055,62.114 ccw(c275.946,62.223) 276.1,62.223 ; 276.226,68.198 ccw(c275.844,67.816) 275.844,68.356 cw(c275.844,67.816) 276.226,68.198 ; 276.226,68.198 cw(c276.608,68.58) 276.068,68.58 ccw(c276.608,68.58) 276.226,68.198 ; 276.977,64.45 ccw(c276.781,64.45) 276.872,64.623 cw(c276.781,64.45) 276.977,64.45 ; 276.977,64.45 cw(c277.172,64.45) 277.081,64.623 ccw(c277.172,64.45) 276.977,64.45 ; 276.977,64.45 277.617,63.809 ; 277.062,59.055 ccw(c277.062,59.488) 277.368,59.182 cw(c277.062,59.488) 277.062,59.055 ; 277.062,59.055 cw(c277.062,58.775) 277.261,58.973 ccw(c277.062,58.775) 277.062,59.055 ; 277.617,63.809 cw(c278.623,64.815) 277.201,64.82 ccw(c278.623,64.815) 277.617,63.809 ; 278.877,67.071 ccw(c278.538,67.071) 278.742,67.342 cw(c278.538,67.071) 278.877,67.071 ; 278.877,67.071 cw(c279.216,67.071) 279.012,67.342 ccw(c279.216,67.071) 278.877,67.071 ; 279.1,59.595 ccw(c278.946,59.595) 279.055,59.704 cw(c278.946,59.595) 279.1,59.595 ; 279.1,59.595 cw(c279.254,59.595) 279.145,59.704 ccw(c279.254,59.595) 279.1,59.595 ; HDMI1.1@279.1,59.752 ccw(c279.64,59.752) 279.258,59.37 cw(c279.64,59.752) HDMI1.1@279.1,59.752 ; HDMI1.1@279.1,59.752 cw(c278.56,59.752) 278.942,59.37 ccw(c278.56,59.752) HDMI1.1@279.1,59.752 ; 279.1,62.223 ccw(c279.254,62.223) 279.145,62.114 cw(c279.254,62.223) 279.1,62.223 ; 279.1,62.223 cw(c278.946,62.223) 279.055,62.114 ccw(c278.946,62.223) 279.1,62.223 ; HDMI1.7@276.055,59.704 cw(c275.951,59.6) 276.098,59.6 ccw(c275.951,59.6) HDMI1.7@276.055,59.704 ; 276.098,59.59 cw(c276.259,59.59) 276.145,59.704 ccw(c276.259,59.59) 276.098,59.59 ; 276.695,59.055 ccw(c276.695,59.855) 277.261,59.289 cw(c276.695,59.855) 276.695,59.055 ; D1A.4@276.896,64.821 ccw(c277.591,64.818) 277.099,64.327 cw(c277.591,64.818) D1A.4@276.896,64.821 ; D1A.4@277.048,64.82 ccw(c278.107,64.817) 277.358,64.068 cw(c278.107,64.817) D1A.4@277.048,64.82 ; HDMI1.4@277.555,59.704 cw(c277.404,59.554) 277.617,59.554 ccw(c277.404,59.554) HDMI1.4@277.555,59.704 ; HDMI1.4@277.555,62.114 ccw(c277.404,62.265) 277.617,62.265 cw(c277.404,62.265) HDMI1.4@277.555,62.114
  Top Layer w0.305: D3A.3@273.207,67.724 273.207,68.56 274.956,70.308 U1A.5@274.956,72.309 ; 274.643,70.099 cw(c275.458,69.881) R25A.2@275.036,70.611 ; 273.207,68.305 ccw(c273.564,68.305) 273.312,68.053 cw(c273.564,68.305) 273.207,68.305 ; 273.207,68.305 cw(c272.851,68.305) 273.103,68.053 ccw(c272.851,68.305) 273.207,68.305 ; 274.41,69.762 ccw(c273.433,70.739) 274.815,70.739 cw(c273.433,70.739) 274.41,69.762 ; R25A.2@274.858,70.635 cw(c274.622,70.399) 274.956,70.399 ccw(c274.622,70.399) R25A.2@274.858,70.635 ; R25A.2@274.858,70.843 ccw(c274.622,71.079) 274.956,71.079 cw(c274.622,71.079) R25A.2@274.858,70.843 ; 274.93,70.283 ccw(c274.474,70.739) 275.119,70.739 cw(c274.474,70.739) 274.93,70.283 ; 274.956,70.367 cw(c275.334,70.367) 275.067,70.635 ccw(c275.334,70.367) 274.956,70.367 ; 274.956,71.111 ccw(c275.334,71.111) 275.067,70.843 cw(c275.334,71.111) 274.956,71.111
  Bottom Layer w0.152: D2A.6@274.371,67.193 274.371,67.793 275.336,68.758 ; v2(275.844,68.58) 275.666,68.758 275.336,68.758 ; v2(277.419,59.131) 277.698,58.852 278.74,58.852 v2(279.1,59.212) ; 274.371,67.733 ccw(c274.911,67.733) 274.529,67.351 cw(c274.911,67.733) 274.371,67.733 ; 274.371,67.733 cw(c273.831,67.733) 274.213,67.351 ccw(c273.831,67.733) 274.371,67.733 ; 275.336,68.758 cw(c275.336,68.46) 275.626,68.528 ccw(c275.336,68.46) 275.336,68.758 ; 275.529,68.758 cw(c275.529,68.505) 275.775,68.564 ccw(c275.529,68.505) 275.529,68.758
NetD1A_3: D1A.3 HDMI1.2 U1A.16 | length 33.3
  Top Layer w0.152: D1A.3@276.977,67.746 276.977,68.53 277.911,69.464 278.541,69.464 280.264,67.742 281.356,67.742 ; HDMI1.2@278.6,60.909 278.6,59.5 278.571,59.471 278.571,58.993 278.967,58.598 279.324,58.598 279.883,59.157 279.883,62.636 281.356,64.11 281.356,67.742 ; U1A.16@280.156,78.109 280.156,76.486 281.356,75.286 281.356,67.742 ; 276.977,68.511 ccw(c277.517,68.511) 277.135,68.129 cw(c277.517,68.511) 276.977,68.511 ; 276.977,68.511 cw(c276.437,68.511) 276.819,68.129 ccw(c276.437,68.511) 276.977,68.511 ; 278.6,59.595 ccw(c278.446,59.595) 278.555,59.704 cw(c278.446,59.595) 278.6,59.595 ; 278.6,59.595 cw(c278.754,59.595) 278.645,59.704 ccw(c278.754,59.595) 278.6,59.595 ; 280.156,77.225 ccw(c279.796,77.225) 280.05,77.479 cw(c279.796,77.225) 280.156,77.225 ; 280.156,77.225 cw(c280.515,77.225) 280.261,77.479 ccw(c280.515,77.225) 280.156,77.225
NetD1A_6: D1A.6 HDMI1.3 U1A.15 | length 33
  Top Layer w0.152: 278.1,59.034 HDMI1.3@278.1,60.909 278.1,63.18 278.877,63.956 D1A.6@278.877,65.046 ; 278.108,59.025 278.841,58.293 279.502,58.293 280.264,59.055 280.264,62.332 281.737,63.805 281.737,75.768 280.806,76.699 U1A.15@280.806,78.109 ; 278.1,59.595 ccw(c277.946,59.595) 278.055,59.704 cw(c277.946,59.595) 278.1,59.595 ; 278.1,59.595 cw(c278.254,59.595) 278.145,59.704 ccw(c278.254,59.595) 278.1,59.595 ; 278.1,62.223 ccw(c278.254,62.223) 278.145,62.114 cw(c278.254,62.223) 278.1,62.223 ; 278.1,62.223 cw(c277.946,62.223) 278.055,62.114 ccw(c277.946,62.223) 278.1,62.223 ; 278.877,64.28 ccw(c278.337,64.28) 278.719,64.662 cw(c278.337,64.28) 278.877,64.28 ; 278.877,64.28 cw(c279.417,64.28) 279.035,64.662 ccw(c279.417,64.28) 278.877,64.28 ; 280.806,77.225 ccw(c280.446,77.225) 280.7,77.479 cw(c280.446,77.225) 280.806,77.225 ; 280.806,77.225 cw(c281.165,77.225) 280.911,77.479 ccw(c281.165,77.225) 280.806,77.225
NetD1B_1: D1B.1 D1B.4 D2B.6 D3B.3 HDMI1.13 HDMI1.16 HDMI2.1 HDMI2.4 R25B.2 U1B.5 | length 87.9
  Top Layer w0.152: HDMI2.4@258.052,60.924 258.052,62.777 v2(258.064,62.789) ; 258.08,62.324 ccw(c258.346,62.253) HDMI2.4@258.108,62.115 ; D1B.4@263.855,64.94 263.855,63.576 264.287,63.144 265.049,63.144 265.481,63.576 270.84,63.576 271.6,62.816 HDMI1.16@271.6,60.909 ; 258.052,62.238 ccw(c258.206,62.238) 258.098,62.129 cw(c258.206,62.238) 258.052,62.238 ; 258.052,62.238 cw(c257.898,62.238) 258.007,62.129 ccw(c257.898,62.238) 258.052,62.238 ; 263.855,64.175 ccw(c263.315,64.175) 263.697,64.557 cw(c263.315,64.175) 263.855,64.175 ; 263.855,64.175 cw(c264.395,64.175) 264.013,64.557 ccw(c264.395,64.175) 263.855,64.175 ; 271.6,62.223 ccw(c271.754,62.223) 271.645,62.114 cw(c271.754,62.223) 271.6,62.223 ; 271.6,62.223 cw(c271.446,62.223) 271.555,62.114 ccw(c271.446,62.223) 271.6,62.223 ; v2@257.906,62.631 cw(c257.552,62.276) 258.052,62.276 ccw(c257.552,62.276) v2@257.906,62.631 ; HDMI2.4@258.052,62.221 cw(c258.632,62.221) 258.222,62.631 ccw(c258.632,62.221) HDMI2.4@258.052,62.221
  Top Layer w0.203: D3B.3@256.238,67.243 cw(c256.07,66.952) 256.394,67.039 ; D3B.3@256.348,67.603 256.348,66.46 v2(256.54,66.269) ; v2@256.369,66.368 ccw(c256.208,66.462) 256.369,66.556 ccw(c256.523,66.645) v2@256.531,66.467 ; v2@256.395,66.404 ccw(c256.137,66.645) 256.442,66.821 ; 256.446,66.844 cw(c257.047,67.005) D3B.3@256.509,67.316 ; v2@256.544,66.265 ccw(c256.347,66.449) 256.58,66.583 ; 258.052,59.346 HDMI2.4@258.052,60.924 ; 258.076,59.323 258.293,59.106 259.334,59.106 259.563,59.334 259.563,62.56 260.248,63.246 261.366,63.246 262.001,63.881 261.996,63.886 D2B.6@261.996,64.94 261.996,65.502 ; D2B.6@261.916,65.347 ccw(c261.785,65.641) 262.096,65.558 ccw(c262.393,65.478) D2B.6@262.152,65.288 ; D2B.6@261.998,65.161 ccw(c261.677,65.718) 262.298,65.551 ; 262.83,67.093 cw(c263.161,67.004) v2@263.092,67.34 ; 262.851,67.072 ccw(c262.762,67.403) v2@263.098,67.334 ; v2(263.093,67.335) 262.622,66.864 262.622,66.128 261.996,65.502 ; D1B.4@263.855,64.94 v2(263.855,66.319) ; v2@263.875,66.122 cw(c263.92,65.676) 264.207,66.02 cw(c264.481,66.349) v2@264.053,66.329 ; 263.931,65.938 264.973,65.938 ; D1B.1@265.76,67.536 265.76,66.726 264.973,65.938 ; HDMI1.16@271.6,60.9 271.6,59.362 271.958,59.004 272.796,59.004 273.101,59.309 HDMI1.13@273.101,60.899 ; 261.996,64.236 ccw(c261.517,64.236) 261.856,64.575 cw(c261.517,64.236) 261.996,64.236 ; 261.996,64.236 cw(c262.475,64.236) 262.136,64.575 ccw(c262.475,64.236) 261.996,64.236 ; 261.996,65.502 ccw(c262.182,65.502) 262.092,65.339 cw(c262.182,65.502) 261.996,65.502 ; 261.996,65.502 cw(c261.81,65.502) 261.9,65.339 ccw(c261.81,65.502) 261.996,65.502 ; 262.755,66.997 ccw(c262.416,67.335) 262.895,67.335 cw(c262.416,67.335) 262.755,66.997 ; 262.755,66.997 cw(c263.093,66.658) 263.093,67.137 ccw(c263.093,66.658) 262.755,66.997 ; 263.855,65.644 ccw(c264.334,65.644) 263.995,65.305 cw(c264.334,65.644) 263.855,65.644 ; 263.855,65.644 cw(c263.376,65.644) 263.715,65.305 ccw(c263.376,65.644) 263.855,65.644 ; 263.855,65.84 ccw(c263.376,65.84) 263.715,66.179 cw(c263.376,65.84) 263.855,65.84 ; 263.855,65.84 cw(c264.334,65.84) 263.995,66.179 ccw(c264.334,65.84) 263.855,65.84 ; 264.973,65.938 cw(c264.973,67.107) 264.017,66.434 ccw(c264.973,67.107) 264.973,65.938 ; D3B.3@256.197,67.275 cw(c255.83,66.908) 256.348,66.908 ccw(c255.83,66.908) D3B.3@256.197,67.275 ; 256.348,66.72 ccw(c256.991,66.72) 256.537,66.265 cw(c256.991,66.72) 256.348,66.72 ; 256.348,66.964 cw(c256.788,66.964) 256.477,67.275 ccw(c256.788,66.964) 256.348,66.964 ; D3B.3@256.348,67.21 ccw(c257.482,67.21) 256.68,66.409 cw(c257.482,67.21) D3B.3@256.348,67.21 ; D2B.6@261.991,65.165 cw(c262.792,65.165) 262.226,65.731 ccw(c262.792,65.165) D2B.6@261.991,65.165 ; D2B.6@262.194,65.165 cw(c263.486,65.165) 262.573,66.078 ccw(c263.486,65.165) D2B.6@262.194,65.165 ; v2@263.685,66.2 ccw(c264.189,66.555) 264.189,65.938 cw(c264.189,66.555) v2@263.685,66.2 ; v2@263.851,66.317 ccw(c264.581,66.831) 264.581,65.938 cw(c264.581,66.831) v2@263.851,66.317 ; D1B.1@265.615,67.275 cw(c265.264,66.924) 265.76,66.924 ccw(c265.264,66.924) D1B.1@265.615,67.275 ; 265.76,66.948 cw(c266.222,66.948) 265.895,67.275 ccw(c266.222,66.948) 265.76,66.948
  Top Layer w0.254: U1B.5@261.087,72.286 261.087,71.374 260.96,71.247 R25B.2@260.96,70.757 261.551,70.757 261.95,70.358 261.95,69.862 263.093,68.719 v2(263.093,67.335) ; 260.96,71.175 ccw(c261.377,71.175) R25B.2@261.082,70.88 ; 260.96,71.175 cw(c260.542,71.175) 260.837,70.88 ccw(c260.542,71.175) 260.96,71.175 ; 260.96,71.175 ccw(c261.377,71.175) R25B.2@261.082,70.88 ; R25B.2@261.082,70.88 ccw(c261.377,71.175) 261.377,70.757 ; R25B.2@261.082,70.88 ccw(c261.377,71.175) 261.377,70.757 ; 261.377,70.757 ccw(c261.377,70.34) 261.082,70.635 cw(c261.377,70.34) 261.377,70.757 ; 263.093,67.753 ccw(c263.511,67.753) 263.216,67.458 cw(c263.511,67.753) 263.093,67.753 ; 263.093,67.753 cw(c262.676,67.753) 262.971,67.458 ccw(c262.676,67.753) 263.093,67.753 ; 261.087,71.505 cw(c261.37,71.505) 261.17,71.706 ccw(c261.37,71.505) 261.087,71.505
  Bottom Layer w0.152: v2(256.54,66.269) 256.773,66.035 256.773,63.419 257.099,63.094 257.759,63.094 ; v2@257.843,62.826 ccw(c257.538,62.877) 257.759,63.094 ; v2@257.844,62.829 ccw(c257.551,62.881) 257.759,63.094 ; v2@258.024,63.009 cw(c257.972,63.301) 257.759,63.094 ; v2@258.027,63.01 cw(c257.976,63.315) 257.759,63.094 ; v2(258.064,62.789) 257.759,63.094 ; 257.759,63.094 ccw(c257.974,63.308) 258.026,63.009 cw(c257.974,63.308) 257.759,63.094 ; 257.759,63.094 cw(c257.545,62.879) 257.844,62.827 ccw(c257.545,62.879) 257.759,63.094
  Bottom Layer w0.203: v2(263.093,67.335) 263.855,66.573 v2(263.855,66.319) ; 263.432,66.997 ccw(c263.093,66.658) 263.093,67.137 cw(c263.093,66.658) 263.432,66.997 ; 263.432,66.997 cw(c263.771,67.335) 263.292,67.335 ccw(c263.771,67.335) 263.432,66.997
NetD1B_3: D1B.3 HDMI1.14 U1B.16 | length 45.9
  Top Layer w0.152: U1B.16@266.294,78.081 266.294,76.632 267.487,75.438 267.487,70.434 266.141,69.088 264.617,69.088 263.855,68.326 ; v2(268.757,62.713) 266.141,62.713 265.227,61.798 264.566,61.798 263.042,63.322 263.042,66.319 263.571,66.848 263.698,66.848 263.855,67.005 ; v2@272.281,63.843 cw(c272.202,63.548) 272.466,63.701 ; v2(272.339,64.059) 272.6,63.798 ; 272.358,63.616 cw(c272.639,63.791) v2@272.392,64.011 ; v2@272.402,63.844 cw(c272.45,63.679) 272.599,63.765 ; 272.466,63.443 cw(c272.797,63.65) v2@272.506,63.91 ; v2@272.537,63.954 ccw(c272.891,63.766) 272.544,63.566 ; v2@272.555,64.001 ccw(c272.819,63.93) 272.582,63.794 ; HDMI1.14@272.6,60.909 272.6,63.798 ; 263.855,67.005 ccw(c263.592,67.005) 263.734,67.227 cw(c263.592,67.005) 263.855,67.005 ; 263.855,67.005 cw(c264.119,67.005) 263.976,67.227 ccw(c264.119,67.005) 263.855,67.005 ; 263.855,67.005 D1B.3@263.855,67.64 263.855,68.326 ; 263.855,68.326 ccw(c264.218,68.326) 263.994,68.041 cw(c264.218,68.326) 263.855,68.326 ; 263.855,68.326 cw(c263.493,68.326) 263.717,68.041 ccw(c263.493,68.326) 263.855,68.326 ; 272.6,62.223 ccw(c272.754,62.223) 272.645,62.114 cw(c272.754,62.223) 272.6,62.223 ; 272.6,62.223 cw(c272.446,62.223) 272.555,62.114 ccw(c272.446,62.223) 272.6,62.223 ; 272.6,63.798 ccw(c272.464,63.661) 272.406,63.845 cw(c272.464,63.661) 272.6,63.798 ; 272.6,63.798 cw(c272.736,63.934) 272.552,63.992 ccw(c272.736,63.934) 272.6,63.798 ; U1B.16@266.195,77.47 cw(c265.958,77.232) 266.294,77.232 ccw(c265.958,77.232) U1B.16@266.195,77.47 ; 266.294,77.199 cw(c266.676,77.199) 266.406,77.47 ccw(c266.676,77.199) 266.294,77.199 ; v2@272.181,63.901 cw(c271.168,62.888) 272.6,62.888 ccw(c271.168,62.888) v2@272.181,63.901 ; v2@272.288,64.008 cw(c271.536,63.256) 272.6,63.256 ccw(c271.536,63.256) v2@272.288,64.008 ; v2@272.396,64.116 cw(c271.904,63.624) 272.6,63.624 ccw(c271.904,63.624) v2@272.396,64.116
  Bottom Layer w0.152: v2(268.757,62.713) 270.078,62.713 270.866,63.5 270.866,63.983 271.272,64.389 272.009,64.389 ; v2(272.339,64.059) 272.009,64.389 ; 272.009,64.389 ccw(c272.274,64.654) 272.315,64.281 cw(c272.274,64.654) 272.009,64.389 ; 272.009,64.389 cw(c271.743,64.124) 272.116,64.083 ccw(c271.743,64.124) 272.009,64.389
NetD1B_6: D1B.6 HDMI1.15 U1B.15 | length 29
  Top Layer w0.152: U1B.15@266.95,78.1 266.95,76.508 267.868,75.59 267.868,70.256 266.294,68.682 266.294,66.726 265.73,66.162 265.73,64.242 266.04,63.932 271.45,63.932 272.1,63.282 HDMI1.15@272.1,60.909 HDMI1.15@272.1,60.9 ; 265.73,64.241 ccw(c265.288,64.241) 265.598,64.556 cw(c265.288,64.241) 265.73,64.241 ; 265.73,64.241 cw(c266.082,64.241) 265.882,64.531 ccw(c266.082,64.241) 265.73,64.241 ; 266.95,77.216 ccw(c266.591,77.216) 266.845,77.47 cw(c266.591,77.216) 266.95,77.216 ; 266.95,77.216 cw(c267.31,77.216) 267.056,77.47 ccw(c267.31,77.216) 266.95,77.216 ; 272.1,62.223 ccw(c272.254,62.223) 272.145,62.114 cw(c272.254,62.223) 272.1,62.223 ; 272.1,62.223 cw(c271.946,62.223) 272.055,62.114 ccw(c271.946,62.223) 272.1,62.223 ; D1B.6@265.597,65.323 ccw(c265.276,65.644) 265.73,65.644 cw(c265.276,65.644) D1B.6@265.597,65.323 ; 265.73,65.767 ccw(c266.357,65.767) 265.913,65.323 cw(c266.357,65.767) 265.73,65.767
NetD1C_1: D1C.1 D1C.4 D2C.6 D3C.3 HDMI2.7 HDMI2.10 HDMI2.13 HDMI2.16 R25C.2 U1C.5 | length 61.5
  Top Layer w0.152: D3C.3@245.024,67.644 245.024,66.838 245.161,66.7 245.573,66.7 245.817,66.457 247.36,66.457 247.574,66.243 247.574,63.373 248.031,62.916 251.46,62.916 252.05,62.326 HDMI2.16@252.05,60.92 ; D2C.6@250.693,64.94 250.693,64.14 ; D1C.4@252.552,64.94 252.552,64.338 252.73,64.16 253.949,64.16 255.05,63.06 HDMI2.10@255.05,60.92 ; 253.415,62.36 ccw(c253.767,62.454) HDMI2.13@253.584,62.139 ; HDMI2.13@253.55,60.92 253.55,62.299 251.866,63.983 250.85,63.983 250.693,64.14 ; D1C.1@254.483,67.61 254.483,67.005 ; HDMI2.7@256.55,60.92 256.55,63.134 255.549,64.135 255.549,66.421 255.118,66.853 254.635,66.853 254.483,67.005 ; 250.693,64.139 cw(c251.259,64.139) 250.872,64.552 ccw(c251.259,64.139) 250.693,64.139 ; 252.552,64.337 ccw(c252.317,64.337) 252.451,64.531 cw(c252.317,64.337) 252.552,64.337 ; 252.552,64.337 cw(c252.739,64.337) 252.666,64.509 ccw(c252.739,64.337) 252.552,64.337 ; 254.483,67.005 ccw(c254.225,67.005) 254.36,67.225 cw(c254.225,67.005) 254.483,67.005 ; 254.483,67.005 cw(c254.752,67.005) 254.602,67.229 ccw(c254.752,67.005) 254.483,67.005 ; D2C.6@250.56,64.557 cw(c250.239,64.236) 250.693,64.236 ccw(c250.239,64.236) D2C.6@250.56,64.557 ; HDMI2.16@252.007,62.129 ccw(c251.904,62.232) 252.05,62.232 cw(c251.904,62.232) HDMI2.16@252.007,62.129 ; 252.05,62.243 ccw(c252.212,62.243) 252.098,62.129 cw(c252.212,62.243) 252.05,62.243 ; 253.293,62.556 cw(c252.82,62.084) 253.489,62.084 ccw(c252.82,62.084) 253.293,62.556 ; HDMI2.13@253.507,62.129 ccw(c253.404,62.232) 253.55,62.232 cw(c253.404,62.232) HDMI2.13@253.507,62.129 ; 253.55,62.243 ccw(c253.712,62.243) 253.598,62.129 cw(c253.712,62.243) 253.55,62.243 ; 253.553,62.296 cw(c253.341,62.084) 253.641,62.084 ccw(c253.341,62.084) 253.553,62.296 ; HDMI2.10@255.007,62.129 ccw(c254.904,62.232) 255.05,62.232 cw(c254.904,62.232) HDMI2.10@255.007,62.129 ; 255.05,62.243 ccw(c255.212,62.243) 255.098,62.129 cw(c255.212,62.243) 255.05,62.243 ; HDMI2.7@256.507,62.129 ccw(c256.404,62.232) 256.55,62.232 cw(c256.404,62.232) HDMI2.7@256.507,62.129 ; 256.55,62.243 ccw(c256.712,62.243) 256.598,62.129 cw(c256.712,62.243) 256.55,62.243
  Top Layer w0.203: HDMI2.16@252.05,60.92 252.05,59.493 252.361,59.182 253.34,59.182 253.55,59.392 253.55,59.505 ; HDMI2.13@253.55,60.92 253.55,59.505 ; 255.05,59.368 254.864,59.182 253.873,59.182 253.55,59.505 ; HDMI2.10@255.05,60.92 255.05,59.402 255.245,59.207 256.413,59.207 256.55,59.344 HDMI2.7@256.55,60.92
  Top Layer w0.254: D3C.3@245.024,67.644 245.024,69.027 245.669,69.672 246.075,69.672 247.167,70.764 R25C.2@247.606,70.764 ; R25C.2@247.6,70.77 U1C.5@247.6,72.3 ; 247.189,70.764 ccw(c247.189,71.182) R25C.2@247.484,70.887 ; 247.189,70.764 cw(c247.189,70.347) 247.484,70.642 ccw(c247.189,70.347) 247.189,70.764 ; 247.189,70.764 ccw(c247.189,71.182) R25C.2@247.484,70.887 ; R25C.2@247.484,70.887 ccw(c247.203,71.168) 247.6,71.168 cw(c247.203,71.168) R25C.2@247.484,70.887 ; 247.6,71.538 ccw(c247.364,71.538) 247.531,71.706 cw(c247.364,71.538) 247.6,71.538 ; 247.6,71.538 cw(c247.837,71.538) 247.67,71.706 ccw(c247.837,71.538) 247.6,71.538 ; D3C.3@244.927,67.991 ccw(c244.693,68.225) 245.024,68.225 cw(c244.693,68.225) D3C.3@244.927,67.991 ; 245.024,68.348 ccw(c245.528,68.348) 245.171,67.991 cw(c245.528,68.348) 245.024,68.348 ; 247.6,71.197 ccw(c248.039,71.197) 247.729,70.887 cw(c248.039,71.197) 247.6,71.197